# Altium PCB board.PcbDoc (part 1 of 2)
Units mil, origin at the board's own origin, x right, y up, seen from the top; angles counter-clockwise.
Board outline 5000 x 4000 mil, 2 copper layers (Top Layer, Bottom Layer); 120 components, 119 nets, 460 pads, 45 vias.
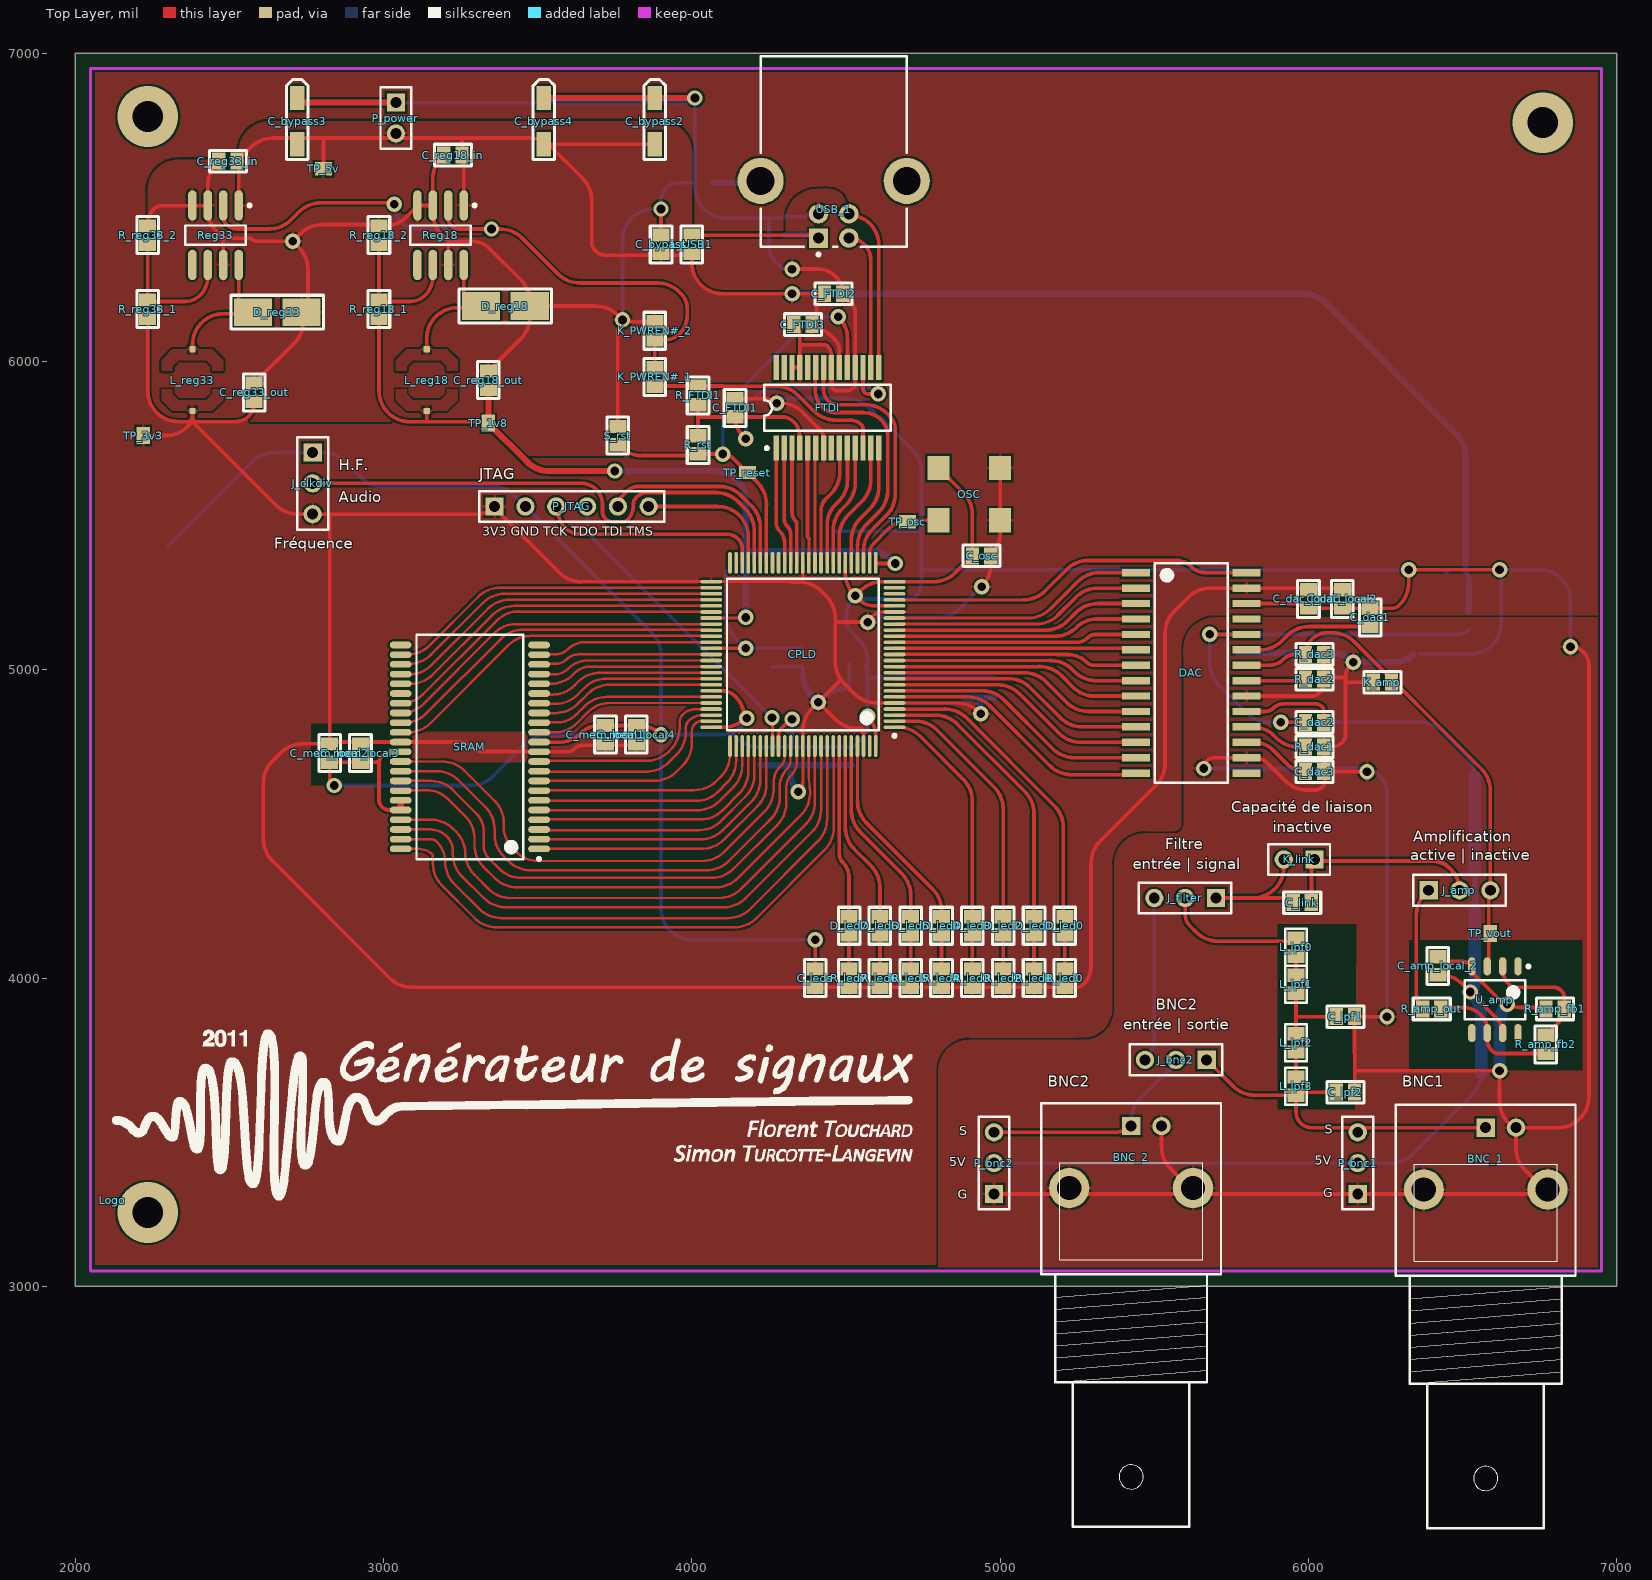
[diagram p0: Top Layer view]
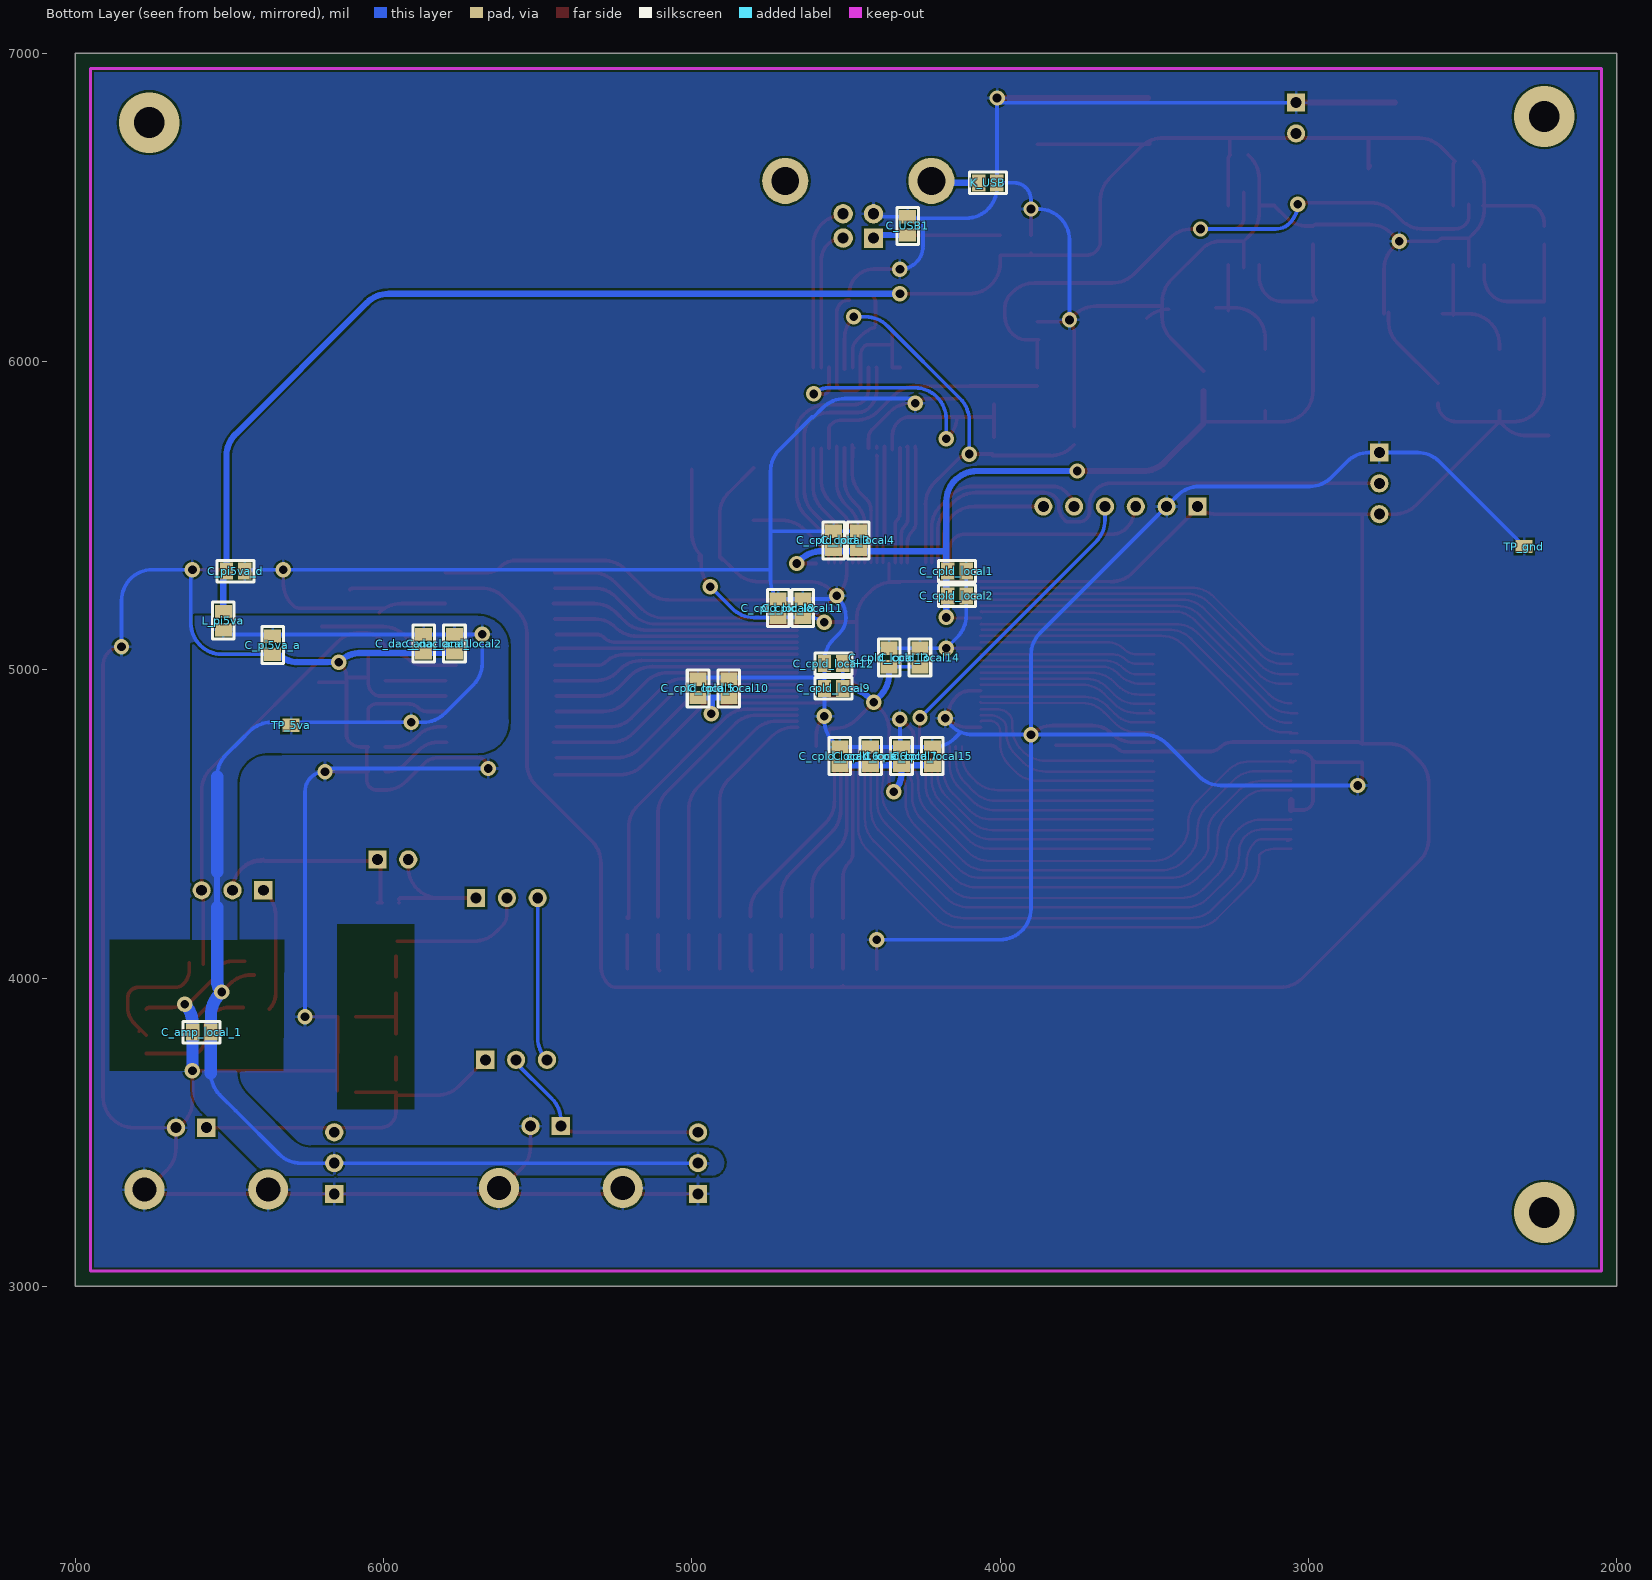
[diagram p1: Bottom Layer view, seen from below]

## Layer stack, top to bottom
Top Layer: signal copper 1.4
Dielectric: dielectric 12.6, FR-4, Dk 4.8
Bottom Layer: signal copper 1.4

## Board outline
2000,3000 7000,3000 7000,7000 2000,7000

## Design rules (kind name [scope] priority, off if disabled: settings)
Clearance Clearance_CPLD [(InComponent('CPLD') OR InComponent('FTDI'))] p1: gap=7
Clearance [All] p2: gap=7
HoleSize [All] p1 off: absolutevalues=TRUE maxlimit=100 minlimit=1 maxpercent=80.000 minpercent=20.000
MinimumSolderMaskSliver [All] p1 off: minsoldermaskwidth=10
PlaneConnect PlaneConnect_1 [IsVia] p1: planeconnectstyle=Direct reliefexpansion=20 reliefentries=4 reliefconductorwidth=10 reliefairgap=10
PlaneConnect [All] p2: planeconnectstyle=Relief reliefexpansion=20 reliefentries=4 reliefconductorwidth=10 reliefairgap=10
PolygonConnect PolygonConnect_1 [All] p1: connectstyle=Relief reliefconductorwidth=10 reliefentries=4 polygonreliefangle="90 Angle"
PolygonConnect [IsVia] p2: connectstyle=Direct reliefconductorwidth=10 reliefentries=4 polygonreliefangle="90 Angle"
RoutingVias [All] p1: holewidth=25 width=40 viastyle="Through Hole" minholewidth=28 minwidth=50 maxholewidth=28 maxwidth=50
SilkToSilkClearance [All] p1 off: silktosilkclearance=0
SilkscreenOverComponentPads [All] p1 off: minsilkscreentomaskgap=0
SolderMaskExpansion [All] p1: expansion=4
Width POWER [(InNet('1V8') OR InNet('3V3') OR InNet('5V') OR InNet('5VA') OR InNet('AGND') OR InNet('GND'))] p1: maxlimit=50 minlimit=10 preferedwidth=15
Width [All] p2: maxlimit=50 minlimit=8 preferedwidth=10
23 further rules are at their usual default settings.

## Classes and differential pairs
net class USB_DATA[7..0]: USB_DATA0 USB_DATA1 USB_DATA2 USB_DATA3 USB_DATA4 USB_DATA5 USB_DATA6 USB_DATA7
net class DAC_DATA[13..0]: DAC_DATA0 DAC_DATA1 DAC_DATA2 DAC_DATA3 DAC_DATA4 DAC_DATA5 DAC_DATA6 DAC_DATA7 DAC_DATA8 DAC_DATA9 DAC_DATA10 DAC_DATA11 DAC_DATA12 DAC_DATA13
component class USB: C_bypass C_bypass2 C_bypass3 C_bypass4 C_FTDI1 C_FTDI2 C_FTDI3 C_USB1 FTDI K_PWREN#_1 K_PWREN#_2 K_USB L_USB1 P_power R_FTDI1 R_rst S_rst TP_5v TP_gnd TP_reset USB_1
component class SRAM: C_mem_local1 C_mem_local2 C_mem_local3 C_mem_local4 SRAM
component class OUTPUT: BNC_1 BNC_2 C_amp_local_1 C_amp_local_2 C_link C_lpf1 C_lpf2 J_amp J_bnc2 J_filter K_amp K_link L_lpf0 L_lpf1 L_lpf2 L_lpf3 P_bnc1 P_bnc2 R_amp_fb1 R_amp_fb2 R_amp_out U_amp
component class DAC: C_dac1 C_dac2 C_dac3 C_dac_ana_local1 C_dac_ana_local2 C_dac_local1 C_dac_local2 DAC R_dac1 R_dac2 R_dac3 TP_vout
component class CPLD: C_cpld_local1 C_cpld_local2 C_cpld_local3 C_cpld_local4 C_cpld_local5 C_cpld_local6 C_cpld_local7 C_cpld_local8 C_cpld_local9 C_cpld_local10 C_cpld_local11 C_cpld_local12 C_cpld_local13 C_cpld_local14 C_cpld_local15 C_cpld_local16 C_leds C_osc CPLD D_led0 D_led1 D_led2 D_led3 D_led4 D_led5 D_led6 D_led7 J_clkdiv OSC P_JTAG R_led0 R_led1 R_led2 R_led3 R_led4 R_led5 R_led6 R_led7 TP_osc
component class ALIMENTATION: C_pi5va_a C_pi5va_d C_reg18_in C_reg18_out C_reg33_in C_reg33_out D_reg18 D_reg33 L_pi5va L_reg18 L_reg33 R_reg18_1 R_reg18_2 R_reg33_1 R_reg33_2 Reg18 Reg33 TP_1v8 TP_3v3 TP_5va
net class MEM_ADDR[15..0]: MEM_ADDR0 MEM_ADDR1 MEM_ADDR2 MEM_ADDR3 MEM_ADDR4 MEM_ADDR5 MEM_ADDR6 MEM_ADDR7 MEM_ADDR8 MEM_ADDR9 MEM_ADDR10 MEM_ADDR11 MEM_ADDR12 MEM_ADDR13 MEM_ADDR14 MEM_ADDR15
net class MEM_DATA[15..0]: MEM_DATA0 MEM_DATA1 MEM_DATA2 MEM_DATA3 MEM_DATA4 MEM_DATA5 MEM_DATA6 MEM_DATA7 MEM_DATA8 MEM_DATA9 MEM_DATA10 MEM_DATA11 MEM_DATA12 MEM_DATA13 MEM_DATA14 MEM_DATA15

## Components (designator, comment, footprint, x,y, rotation, side; value= is the part's Value field where it differs from the comment)
BNC_1 "BNC1" "BNC_RA CON" 6575,3515 r90 top
BNC_2 "BNC2" "BNC_RA CON" 5425,3520 r90 top
C_amp_local_1 "Cap Semi" 0805 6590,3825 r180 bottom
C_amp_local_2 "Cap Semi" 0805 6420,4040 r270 top
C_bypass "Cap" 0805 3900,6380 r90 top
C_bypass2 "Cap" Capacitor_bypass 3880,6780 r90 top
C_bypass3 "Cap" Capacitor_bypass 2720,6780 r90 top
C_bypass4 "Cap" Capacitor_bypass 3520,6780 r90 top
C_cpld_local1 "Cap Semi" 0805 4140,5320 r0 bottom
C_cpld_local2 "Cap Semi" 0805 4140,5240 r0 bottom
C_cpld_local3 "Cap Semi" 0805 4540,5420 r270 bottom
C_cpld_local4 "Cap Semi" 0805 4460,5420 r270 bottom
C_cpld_local5 "Cap Semi" 0805 4980,4940 r90 bottom
C_cpld_local6 "Cap Semi" 0805 4420,4720 r90 bottom
C_cpld_local7 "Cap Semi" 0805 4320,4720 r90 bottom
C_cpld_local8 "Cap Semi" 0805 4720,5200 r90 bottom
C_cpld_local9 "Cap Semi" 0805 4540,4940 r0 bottom
C_cpld_local10 "Cap Semi" 0805 4880,4940 r90 bottom
C_cpld_local11 "Cap Semi" 0805 4640,5200 r90 bottom
C_cpld_local12 "Cap Semi" 0805 4540,5020 r0 bottom
C_cpld_local13 "Cap Semi" 0805 4360,5040 r90 bottom
C_cpld_local14 "Cap Semi" 0805 4260,5040 r90 bottom
C_cpld_local15 "Cap Semi" 0805 4220,4720 r270 bottom
C_cpld_local16 "Cap Semi" 0805 4520,4720 r270 bottom
C_dac1 "Cap" 0805 6200,5170 r270 top
C_dac2 "Cap" 0805 6020,4830 r0 top
C_dac3 "Cap" 0805 6020,4670 r0 top
C_dac_ana_local1 "Cap Semi" 0805 5870,5085 r90 bottom
C_dac_ana_local2 "Cap Semi" 0805 5770,5085 r90 bottom
C_dac_local1 "Cap Semi" 0805 6000,5230 r90 top
C_dac_local2 "Cap Semi" 0805 6110,5230 r90 top
C_FTDI1 "Cap" 0805 4140,5850 r90 top
C_FTDI2 "Cap" 0805 4460,6220 r180 top
C_FTDI3 "Cap" 0805 4360,6120 r0 top
C_leds "Cap Semi" 0805 4400,4000 r270 top
C_link "ACCap" 0805 5980,4245 r180 top
C_lpf1 "Cap" 0805 6120,3875 r180 top
C_lpf2 "Cap" 0805 6120,3630 r180 top
C_mem_local1 "Cap Semi" 0805 3720,4790 r270 top
C_mem_local2 "Cap Semi" 0805 2825,4730 r90 top
C_mem_local3 "Cap Semi" 0805 2925,4730 r270 top
C_mem_local4 "Cap Semi" 0805 3820,4790 r90 top
C_osc "Cap Semi" 0805 4940,5370 r0 top
C_pi5va_a "Cap" 0805 6360,5080 r270 bottom
C_pi5va_d "Cap" 0805 6480,5320 r180 bottom
C_reg18_in "Cap" 0805 3225,6670 r0 top
C_reg18_out "Cap" 0805 3340,5940 r90 top
C_reg33_in "Cap" 0805 2495,6650 r0 top
C_reg33_out "Cap" 0805 2580,5900 r90 top
C_USB1 "Cap" 0805 4300,6440 r90 bottom
CPLD "XC2C256-7VQ100I" VQ100_N 4360,5050 r180 top
D_led0 "LED3" 0805 5210,4170 r90 top
D_led1 "LED3" 0805 5110,4170 r90 top
D_led2 "LED3" 0805 5010,4170 r90 top
D_led3 "LED3" 0805 4910,4170 r90 top
D_led4 "LED3" 0805 4810,4170 r90 top
D_led5 "LED3" 0805 4710,4170 r90 top
D_led6 "LED3" 0805 4610,4170 r90 top
D_led7 "LED3" 0805 4510,4170 r90 top
D_reg18 "Schottky FWD" Diode 3395,6180 r180 top
D_reg33 "Schottky FWD" Diode 2655,6160 r180 top
DAC "DAC" SOIC28 5620,4990 r0 top
FTDI "FT245RL" SSOP28 4440,5850 r0 top
J_amp "AOPActif" HDR1X3 6390,4285 r0 top
J_bnc2 "BNC2Mode" HDR1X3 5670,3735 r180 top
J_clkdiv "ClkDivision" HDR1X3 2770,5705 r270 top
J_filter "FiltreMode" HDR1X3 5700,4260 r180 top
K_amp "Res2" 0805 6240,4960 r0 top
K_link "Header 2" HDR1X2 6020,4385 r180 top
K_PWREN#_1 "Res2" 0805 3880,5950 r90 top
K_PWREN#_2 "Res2" 0805 3880,6100 r90 top
K_USB "Res2" 0805 4040,6580 r180 bottom
L_lpf0 "Inductor" 0805 5960,4100 r270 top
L_lpf1 "Inductor" 0805 5960,3980 r270 top
L_lpf2 "Inductor" 0805 5960,3790 r270 top
L_lpf3 "Inductor" 0805 5960,3650 r270 top
L_pi5va "Inductor" 0805 6520,5160 r270 bottom
L_reg18 "Inductor" Bobine_alim 3140,5940 r270 top
L_reg33 "Inductor" Bobine_alim 2380,5940 r270 top
L_USB1 "Inductor" 0805 4000,6380 r270 top
Logo "Comment" ? 2120,3280 r0 top
OSC "Osc" OSC 4900,5570 r180 top
P_bnc1 "Header 3" HDR1X3 6160,3300 r90 top
P_bnc2 "Header 3" HDR1X3 4980,3300 r90 top
P_JTAG "Header 6" HDR1X6 3360,5530 r0 top
P_power "Header 2" HDR1X2 3040,6840 r270 top
R_amp_fb1 "RNegFdbk1" 0805 6800,3900 r0 top
R_amp_fb2 "RNegFdbk2" 0805 6770,3785 r90 top
R_amp_out "RAopZOutput" 0805 6400,3900 r0 top
R_dac1 "Res2" 0805 6020,4750 r180 top
R_dac2 "Res2" 0805 6020,4970 r180 top
R_dac3 "Res2" 0805 6020,5050 r180 top
R_FTDI1 "Res2" 0805 4020,5890 r270 top
R_led0 "Res2" 0805 5210,4000 r270 top
R_led1 "Res2" 0805 5110,4000 r270 top
R_led2 "Res2" 0805 5010,4000 r270 top
R_led3 "Res2" 0805 4910,4000 r270 top
R_led4 "Res2" 0805 4810,4000 r270 top
R_led5 "Res2" 0805 4710,4000 r270 top
R_led6 "Res2" 0805 4610,4000 r270 top
R_led7 "Res2" 0805 4510,4000 r270 top
R_reg18_1 "Res3" 0805 2985,6170 r270 top
R_reg18_2 "Res3" 0805 2985,6410 r90 top
R_reg33_1 "Res3" 0805 2235,6170 r270 top
R_reg33_2 "Res3" 0805 2235,6410 r90 top
R_rst "Res2" 0805 4020,5730 r90 top
Reg18 "Hacheur" SOIC8_M 3185,6410 r270 top
Reg33 "Hacheur" SOIC8_M 2455,6410 r270 top
S_rst "SW-SPST" 0805 3760,5760 r270 top
SRAM "SRAM" TSOP44 3280,4750 r180 top
TP_1v8 "TestPoint" testpoint 3340,5800 r180 top
TP_3v3 "TestPoint" testpoint 2220,5760 r180 top
TP_5v "TestPoint" testpoint 2805,6625 r90 top
TP_5va "TestPoint" testpoint 6300,4820 r270 bottom
TP_gnd "TestPoint" testpoint 2300,5400 r270 bottom
TP_osc "TestPoint" testpoint 4700,5480 r90 top
TP_reset "TestPoint" testpoint 4180,5640 r90 top
TP_vout "TestPoint" testpoint 6590,4145 r0 top
U_amp "AOP" SOIC127P600-8CN 6605,3930 r270 top
USB_1 "USB" USB2.5-2H4E 4460,6440 r90 top

## Footprints (in the part's own frame and the unit in brackets; to place one, negate y for a bottom-side part, rotate by r counter-clockwise, add the part's x,y. Pads: shape width x height; smd on the part's side, far side on the other; paste and mask are expansions set on the pad)
0805 [mm]
  rect 1.1x1.4 smd: 1(-0.75,0) 2(0.75,0)
  silkscreen extent -1.52,-0.89 1.52,0.89, body extent -1.1,-0.72 1.1,0.72, height 1.1
"BNC_RA CON" [mm] "Connector; BNC Elbow"
  rect 1.5x1.5 hole 0.9: 1(0,0)
  round 3.3 hole 2: 2(-5.1,-5.1) 2(-5.1,5.1)
  round 1.5 hole 0.9: 2(0,-2.5)
  silkscreen extent -33,-7.4 1.9,7.4
Bobine_alim [mil]
  rect 20x20 smd: 1(-100,0) 2(100,0)
Capacitor_bypass [mm]
  rect 2x1.2 smd: 1(-1.9,0) 2(1.9,0)
  silkscreen extent -3.17,-0.89 3.43,0.89
Diode [mm]
  rect 3.14x2.3 smd: 1(-2.01,0) 2(2.01,0)
  silkscreen extent -3.81,-1.4 3.81,1.4
HDR1X2 [mm] "Connector; Header; 2 Position"
  rect 1.5x1.5 hole 0.9: 1(0,0)
  round 1.5 hole 0.9: 2(2.54,0)
  silkscreen extent -1.27,-1.27 3.81,1.27
HDR1X3 [mm] "Connector; Header; 3 Position"
  rect 1.5x1.5 hole 0.9: 1(0,0)
  round 1.5 hole 0.9: 2(2.54,0) 3(5.08,0)
  silkscreen extent -1.27,-1.27 6.35,1.27
HDR1X6 [mm] "Connector; Header; 6 Position"
  rect 1.5x1.5 hole 0.9: 1(0,0)
  round 1.5 hole 0.9: 2(2.54,0) 3(5.08,0) 4(7.62,0) 5(10.16,0) 6(12.7,0)
  silkscreen extent -1.27,-1.27 13.97,1.27
OSC [mil]
  rect 71x79 smd: 1(-100,-85) 2(100,-85) 3(100,85) 4(-100,85)
SOIC8_M [mm] "SOIC, 8-Leads, Body 4.9x3.9mm, Pitch 1.27mm, IPC Low Density"
  oval 2.5x0.7 smd: 1(-2.45,1.905) 2(-2.45,0.635) 3(-2.45,-0.635) 4(-2.45,-1.905) 5(2.45,-1.905) 6(2.45,-0.635) 7(2.45,0.635) 8(2.45,1.905)
  silkscreen extent -2.57,-2.5 0.8,2.93, body extent -2,-2.5 2,2.5, height 1.75
SOIC28 [mm]
  rect 2.3x0.6 smd: 1(-4.55,8.255) 2(-4.55,6.985) 3(-4.55,5.715) 4(-4.55,4.445) 5(-4.55,3.175) 6(-4.55,1.905) 7(-4.55,0.635) 8(-4.55,-0.635) 9(-4.55,-1.905) 10(-4.55,-3.175) 11(-4.55,-4.445) 12(-4.55,-5.715) 13(-4.55,-6.985) 14(-4.55,-8.255) 15(4.55,-8.255) 16(4.55,-6.985) 17(4.55,-5.715) 18(4.55,-4.445) 19(4.55,-3.175) 20(4.55,-1.905) 21(4.55,-0.635) 22(4.55,0.635) 23(4.55,1.905) 24(4.55,3.175) 25(4.55,4.445) 26(4.55,5.715) 27(4.55,6.985) 28(4.55,8.255)
  silkscreen extent -3,-9.05 3,9.05, body extent -3.8,-9.06 3.8,9.06, height 2.65
SOIC127P600-8CN [mm] "SOIC, 8-Leads, Body 4.9x3.9mm, Pitch 1.27mm, IPC Medium Density"
  oval 1.5x0.6 smd: 1(-2.75,1.905) 2(-2.75,0.635) 3(-2.75,-0.635) 4(-2.75,-1.905) 5(2.75,-1.905) 6(2.75,-0.635) 7(2.75,0.635) 8(2.75,1.905)
  silkscreen extent -2.87,-2.5 1.6,2.88, body extent -2,-2.5 2,2.5, height 1.73
SSOP28 [mm] "SSOP; 28 Leads; Body Width 5.3 mm; Pitch 0.65 mm"
  rect 0.45x2.05 smd: 1(-4.225,-3.325) 2(-3.575,-3.325) 3(-2.925,-3.325) 4(-2.275,-3.325) 5(-1.625,-3.325) 6(-0.975,-3.325) 7(-0.325,-3.325) 8(0.325,-3.325) 9(0.975,-3.325) 10(1.625,-3.325) 11(2.275,-3.325) 12(2.925,-3.325) 13(3.575,-3.325) 14(4.225,-3.325) 15(4.225,3.325) 16(3.575,3.325) 17(2.925,3.325) 18(2.275,3.325) 19(1.625,3.325) 20(0.975,3.325) 21(0.325,3.325) 22(-0.325,3.325) 23(-0.975,3.325) 24(-1.625,3.325) 25(-2.275,3.325) 26(-2.925,3.325) 27(-3.575,3.325) 28(-4.225,3.325)
  silkscreen extent -5.2,-3.45 5.2,1.9
testpoint [mm]
  rect 1.1x1.4 smd: 1(0,0)
  body extent -1.1,-0.72 1.1,0.72, height 1.1
TSOP44 [mm]
  oval 1.8x0.55 smd: 1(-5.7,8.4) 2(-5.7,7.6) 3(-5.7,6.8) 4(-5.7,6) 5(-5.7,5.2) 6(-5.7,4.4) 7(-5.7,3.6) 8(-5.7,2.8) 9(-5.7,2) 10(-5.7,1.2) 11(-5.7,0.4) 12(-5.7,-0.4) 13(-5.7,-1.2) 14(-5.7,-2) 15(-5.7,-2.8) 16(-5.7,-3.6) 17(-5.7,-4.4) 18(-5.7,-5.2) 19(-5.7,-6) 20(-5.7,-6.8) 21(-5.7,-7.6) 22(-5.7,-8.4) 23(5.7,-8.4) 24(5.7,-7.6) 25(5.7,-6.8) 26(5.7,-6) 27(5.7,-5.2) 28(5.7,-4.4) 29(5.7,-3.6) 30(5.7,-2.8) 31(5.7,-2) 32(5.7,-1.2) 33(5.7,-0.4) 34(5.7,0.4) 35(5.7,1.2) 36(5.7,2) 37(5.7,2.8) 38(5.7,3.6) 39(5.7,4.4) 40(5.7,5.2) 41(5.7,6) 42(5.7,6.8) 43(5.7,7.6) 44(5.7,8.4)
  silkscreen extent -5.82,-9.25 4.4,9.35, body extent -5.13,-9.26 5.13,9.26, height 1.2
USB2.5-2H4E [mm] "Connector; USB1.1, Type B, Thru-Hole; 4 Position; Right Angle"
  rect 1.6x1.6 hole 0.92: 1(-1,1.25)
  round 1.6 hole 0.92: 2(-1,-1.25) 3(1,-1.25) 4(1,1.25)
  round 3.8 hole 2.3: 5(3.71,6.02) 6(3.71,-6.02)
  silkscreen extent -2.47,-6.02 13.99,6.02, body extent -1.72,-6.02 13.99,6.02, height 11.5
VQ100_N [mm] "100-Pin Very Thin Quad Flat Pack (VQ100), IPC Medium Density"
  oval 1.8x0.3 smd: 1(-7.55,6) 2(-7.55,5.5) 3(-7.55,5) 4(-7.55,4.5) 5(-7.55,4) 6(-7.55,3.5) 7(-7.55,3) 8(-7.55,2.5) 9(-7.55,2) 10(-7.55,1.5) 11(-7.55,1) 12(-7.55,0.5) 13(-7.55,0) 14(-7.55,-0.5) 15(-7.55,-1) 16(-7.55,-1.5) 17(-7.55,-2) 18(-7.55,-2.5) 19(-7.55,-3) 20(-7.55,-3.5) 21(-7.55,-4) 22(-7.55,-4.5) 23(-7.55,-5) 24(-7.55,-5.5) 25(-7.55,-6) 51(7.55,-6) 52(7.55,-5.5) 53(7.55,-5) 54(7.55,-4.5) 55(7.55,-4) 56(7.55,-3.5) 57(7.55,-3) 58(7.55,-2.5) 59(7.55,-2) 60(7.55,-1.5) 61(7.55,-1) 62(7.55,-0.5) 63(7.55,0) 64(7.55,0.5) 65(7.55,1) 66(7.55,1.5) 67(7.55,2) 68(7.55,2.5) 69(7.55,3) 70(7.55,3.5) 71(7.55,4) 72(7.55,4.5) 73(7.55,5) 74(7.55,5.5) 75(7.55,6)
  oval 0.3x1.8 smd: 26(-6,-7.55) 27(-5.5,-7.55) 28(-5,-7.55) 29(-4.5,-7.55) 30(-4,-7.55) 31(-3.5,-7.55) 32(-3,-7.55) 33(-2.5,-7.55) 34(-2,-7.55) 35(-1.5,-7.55) 36(-1,-7.55) 37(-0.5,-7.55) 38(0,-7.55) 39(0.5,-7.55) 40(1,-7.55) 41(1.5,-7.55) 42(2,-7.55) 43(2.5,-7.55) 44(3,-7.55) 45(3.5,-7.55) 46(4,-7.55) 47(4.5,-7.55) 48(5,-7.55) 49(5.5,-7.55) 50(6,-7.55) 76(6,7.55) 77(5.5,7.55) 78(5,7.55) 79(4.5,7.55) 80(4,7.55) 81(3.5,7.55) 82(3,7.55) 83(2.5,7.55) 84(2,7.55) 85(1.5,7.55) 86(1,7.55) 87(0.5,7.55) 88(0,7.55) 89(-0.5,7.55) 90(-1,7.55) 91(-1.5,7.55) 92(-2,7.55) 93(-2.5,7.55) 94(-3,7.55) 95(-3.5,7.55) 96(-4,7.55) 97(-4.5,7.55) 98(-5,7.55) 99(-5.5,7.55) 100(-6,7.55)
  silkscreen extent -7.68,-6.25 6.25,6.82, body extent -7,-7 7,7, height 1.2
? [mil]
  silkscreen extent 0,0 2595,552

## Part data
BNC_1 BNC_2: library part BNC, "BNC Elbow Connector"
C_amp_local_1 C_amp_local_2 C_cpld_local1 C_cpld_local2 C_cpld_local3 C_cpld_local4 C_cpld_local5 C_cpld_local6 C_cpld_local7 C_cpld_local8 C_cpld_local9 C_cpld_local10 C_cpld_local11 C_cpld_local12 C_cpld_local13 C_cpld_local14 C_cpld_local15 C_cpld_local16 C_dac_ana_local1 C_dac_ana_local2 C_dac_local1 C_dac_local2 C_leds C_mem_local1 C_mem_local2 C_mem_local3 C_mem_local4 C_osc: "Capacitor (Semiconductor SIM Model)"
C_bypass C_bypass2 C_bypass3 C_bypass4 C_dac1 C_dac2 C_dac3 C_FTDI1 C_FTDI2 C_FTDI3 C_lpf1 C_lpf2 C_pi5va_a C_pi5va_d C_reg18_in C_reg18_out C_reg33_in C_reg33_out C_USB1: "Capacitor"
C_link: library part Cap, "Capacitor"
CPLD: "CoolRunner-II 1.8V, 256 Macrocell CPLD, 80 User I/Os, 100-Pin VQFP, Industrial Grade"
D_led0 D_led1 D_led2 D_led3 D_led4 D_led5 D_led6 D_led7: "Typical BLUE SiC LED"
D_reg18 D_reg33: library part "Diode BAT17", "Silicon RF Schottky Diode for Mixer Applications in the VHF/UHF Range"
J_amp J_bnc2 J_clkdiv J_filter: library part "Header 3", "Header, 3-Pin"
K_amp K_PWREN#_1 K_PWREN#_2 K_USB R_dac1 R_dac2 R_dac3 R_FTDI1 R_led0 R_led1 R_led2 R_led3 R_led4 R_led5 R_led6 R_led7 R_reg18_1 R_reg18_2 R_reg33_1 R_reg33_2 R_rst: "Resistor"
K_link P_power: "Header, 2-Pin"
P_bnc1 P_bnc2: "Header, 3-Pin"
P_JTAG: "Header, 6-Pin"
R_amp_fb1 R_amp_fb2 R_amp_out: library part Res3, "Resistor"
S_rst: "Single-Pole, Single-Throw Switch"

## Via types
v1: diameter 50, hole 28, Top Layer to Bottom Layer, 42 vias
v2: diameter 196.85, hole 100, Top Layer to Bottom Layer, 3 vias

## Nets (pads, with @x,y where several pads share a name; then routed paths per layer and width w, separated by ;. In a path a pad name is that pad's centre, name@x,y a point inside that pad or via, vN(x,y) a via of type N, cw(c..) or ccw(c..) an arc to the next point about the centre after c; other vN are vias at no path point)
1V8: C_cpld_local1.2 C_cpld_local2.2 C_cpld_local3.2 C_cpld_local4.2 C_reg18_out.1 CPLD.26 CPLD.57 L_reg18.2 R_reg18_1.2 TP_1v8.1 | length 2811.9
  Top Layer w11: CPLD.57@4062.76,5168.11 v1@4170.44,5168.11
  Top Layer w12: 2985,6111.42 R_reg18_1.2@2985,6140 ; R_reg18_1.2@2985,6140.47 2985,5905 ccw(c3085,5905) 3085,5805 3140,5805 ; L_reg18.2@3140,5840 3140,5805 ; TP_1v8.1@3340,5805 3140,5805 ; CPLD.26@4596.54,5345 v1(4660,5345)
  Top Layer w20: C_reg18_out.1@3340,5905 3340,5805 TP_1v8.1@3340,5800 3465.71,5674.29 ccw(c3536.42,5745) 3536.42,5645 v1(3750,5645)
  Bottom Layer w12: v1@4649.29,5355.71 v1(4660,5345) v1@4659.76,5345.24
  Bottom Layer w20: v1(3750,5645) 4075,5645 cw(c4075,5545) 4175,5545 4175,5385 ; v1(4175,5170) 4175,5228.79 4175,5320 4175,5385 ; v1@4649.29,5355.71 ccw(c4578.58,5285) 4578.58,5385 4175,5385
3V3: C_cpld_local5.1 C_cpld_local6.1 C_cpld_local7.1 C_cpld_local8.1 C_cpld_local9.1 C_cpld_local10.1 C_cpld_local11.1 C_cpld_local12.1 C_cpld_local13.1 C_cpld_local14.1 C_cpld_local15.2 C_cpld_local16.2 C_dac_local1.2 C_dac_local2.2 C_leds.2 C_mem_local1.2 C_mem_local2.2 C_mem_local3.1 C_mem_local4.1 C_osc.2 C_reg33_out.1 CPLD.5 CPLD.20 CPLD.38 CPLD.51 CPLD.88 CPLD.98 DAC.27 J_clkdiv.3 L_reg33.2 OSC.1 OSC.4 P_JTAG.1 R_led0.2 R_led1.2 R_led2.2 R_led3.2 R_led4.2 R_led5.2 R_led6.2 R_led7.2 R_reg33_1.2 SRAM.11 SRAM.33 TP_3v3.1 | length 14042.2
  Top Layer w10: 3640.2,5286.22 CPLD.51@4062.76,5286.22 4328.8,5286.22 ; 4360,4634.14 CPLD.88@4360,4752.76 4360,4803.58 ; 4360,5284.35 CPLD.38@4360,5347.24 ; CPLD.98@4556.85,4781.39 CPLD.98@4556.85,4752.76 4556.85,4793.46 ; 4598.9,4892.52 CPLD.5@4657.24,4892.52
  Top Layer w11: v1@4580,5170 cw(c4622.96,5127.04) CPLD.20@4624.93,5187.76 ; CPLD.5@4657.24,4892.52 4861.06,4892.52 cw(c4861.06,4792.52) v1@4931.77,4863.23
  Top Layer w12: TP_3v3.1@2220,5760 2293.58,5760 ccw(c2293.58,5860) 2364.29,5789.29 2380,5805 ; 2235,6111.42 R_reg33_1.2@2235,6140.47 2235,5905 ccw(c2335,5905) 2335,5805 2380,5805 ; L_reg33.2@2380,5840 2380,5805 ; C_reg33_out.1@2580,5865 cw(c2520,5865) 2520,5805 2380,5805 ; C_mem_local2.2@2820,4760 2736.42,4760 ccw(c2736.42,4660) 2665.71,4730.71 2639.29,4704.29 ccw(c2710,4633.58) 2610,4633.58 2610,4451.42 ccw(c2710,4451.42) 2639.29,4380.71 3020.24,3999.76 ccw(c3090.95,4070.47) 3090.95,3970.47 C_leds.2@4400,3970.47 4508.86,3970.47 cw(c4508.86,3968.86) R_led7.2@4510,3970 ; 2825,5500 C_mem_local2.2@2825,4760 ; 2943.79,5505 2930,5505 ; SRAM.33@3055,4765 SRAM.33@3055.59,4765 ; P_JTAG.1@3360,5525 3569.49,5315.51 ccw(c3640.2,5386.22) 3640.2,5286.22 ; SRAM.11@3504.41,4734.25 3594.05,4734.25 ccw(c3594.05,4770.95) 3620,4745 cw(c3644.14,4720.86) 3644.14,4755 C_mem_local4.1@3820,4755 ; SRAM.11@3510,4735 3505,4735 3321.21,4735 cw(c3321.21,4786.21) 3285,4750 ccw(c3246.98,4711.98) 3246.98,4765.75 SRAM.33@3055.59,4765.75 2838.88,4765.75 ccw(c2838.88,4746.12) C_mem_local2.2@2825,4760 ; 4325,5285 4348.58,5285 cw(c4348.58,5185) 4360,5284.35 cw(c4348.58,5185) 4419.29,5255.71 4435.71,5239.29 cw(c4365,5168.58) 4463.14,5187.8 cw(c4365,5168.58) 4465,5168.58 4465,5155 ; v1(4345,4605) 4350,4610 ccw(c4325.86,4634.14) 4360,4634.14 ; 4360,4803.58 cw(c4460,4803.58) 4389.29,4874.29 v1(4410,4895) ; R_led7.2@4510,3975 ccw(c4520.93,3985.93) 4520.93,3970.47 R_led6.2@4610,3970.47 R_led5.2@4710,3970.47 R_led4.2@4810,3970.47 R_led3.2@4910,3970.47 R_led2.2@5010,3970.47 R_led1.2@5110,3970.47 R_led0.2@5210,3970.47 5247,3970.47 ccw(c5247,4003) 5266.4,3976.89 ccw(c5247,4003) 5270,3980 ccw(c5209.64,4040.36) 5295,4040.36 5295,4373.58 cw(c5395,4373.58) 5324.29,4444.29 5505.71,4625.71 ccw(c5435,4696.42) 5535,4696.42 5535,5118.58 cw(c5635,5118.58) 5564.29,5189.29 5610.71,5235.71 cw(c5681.42,5165) 5681.42,5265 DAC.27@5799.13,5265 ; 4556.85,4793.46 ccw(c4533.46,4793.46) 4550,4810 4536.42,4810 cw(c4536.42,4910) 4465.71,4839.29 v1(4410,4895) ; v1@4570,5172.93 v1(4570,5155) ; v1@4577.07,5172.07 ccw(c4594.14,5155) v1(4570,5155) ; 4598.9,4892.52 cw(c4598.9,4992.52) 4528.19,4921.81 4494.29,4955.71 cw(c4565,5026.42) 4483.49,4968.49 ; v1(4940,5270) 4940.24,5270.24 ccw(c4869.53,5340.95) 4969.53,5340.95 C_osc.2@4969.53,5370 4970.71,5371.18 ccw(c4900,5441.89) 5000,5441.89 OSC.4@5000,5485 OSC.1@5000,5650 ; C_osc.2@4975,5354.14 C_osc.2@4975,5370 ; R_led0.2@5205,3970 R_led0.2@5210,3970 ; DAC.27@5800,5265 DAC.27@5799.13,5265 ; C_dac_local2.2@6110,5260 ccw(c6097.93,5247.93) 6097.93,5265 DAC.27@5799.13,5265 ; 2380,5805 2650.71,5534.29 ccw(c2721.42,5605) 2721.42,5505 J_clkdiv.3@2770,5505 2930,5505 ; C_mem_local2.2@2825,4759.53 cw(c2838.21,4746.32) C_mem_local2.2@2838.21,4765 ; C_mem_local2.2@2825,4759.53 cw(c2838.21,4746.32) C_mem_local2.2@2838.21,4765 ; C_mem_local2.2@2825,4759.53 cw(c2838.21,4746.32) C_mem_local2.2@2838.21,4765 ; C_mem_local2.2@2825,4759.53 cw(c2838.21,4746.32) C_mem_local2.2@2838.21,4765 ; C_mem_local2.2@2825,4759.53 C_mem_local2.2@2825,4760 ; 2930,5505 3299.64,5505 ; 3299.64,5505 ccw(c3299.64,5590.36) P_JTAG.1@3360,5530 ; 3299.64,5505 ccw(c3299.64,5590.36) P_JTAG.1@3360,5530 ; 3299.64,5505 ccw(c3299.64,5590.36) P_JTAG.1@3360,5530 ; 3299.64,5505 ccw(c3299.64,5590.36) P_JTAG.1@3360,5530 ; v1(4410,4895) 4483.49,4968.49 ; 4465,5155 v1(4570,5155) ; 4465,5155 4465,5026.42 ccw(c4565,5026.42) 4483.49,4968.49 ; C_dac_local2.2@6096.79,5265 cw(c6096.79,5246.32) C_dac_local2.2@6110,5259.53 ccw(c6096.79,5246.32) C_dac_local2.2@6096.79,5265
  Bottom Layer w12: C_cpld_local15.2@4220,4690 cw(c4221.14,4688.86) C_cpld_local15.2@4221.14,4690.47 ; C_cpld_local14.1@4260,5010 4358.86,5010 ccw(c4358.86,5011.61) C_cpld_local13.1@4360,5010.47 4360,4986.42 ; 4320,4665.36 ccw(c4405.36,4665.36) v1(4345,4605) ; C_cpld_local9.1@4496.42,4940 C_cpld_local9.1@4510.47,4940 ; C_cpld_local9.1@4510,4935 ccw(c4508.86,4936.14) 4510.47,4936.14 C_cpld_local9.1@4510.47,4940 ; C_cpld_local12.1@4510.47,5020 C_cpld_local9.1@4510.47,4940 ; v1(4570,5155) 4570,5150 cw(c4619.43,5100.57) 4619.43,5170.47 C_cpld_local11.1@4640,5170.47 C_cpld_local8.1@4720,5170.47 ; C_cpld_local11.1@4640,5170 cw(c4641.14,5168.86) C_cpld_local11.1@4641.14,5170.47 ; C_cpld_local8.1@4720,5170 4798.58,5170 ccw(c4798.58,5270) 4869.29,5199.29 v1(4940,5270) ; 4935,4910 4980,4910 C_cpld_local5.1@4980,4910.47 ; C_cpld_local16.2@4518.86,4690 ccw(c4518.86,4691.61) C_cpld_local16.2@4520,4690.47 cw(c4518.86,4691.61) C_cpld_local16.2@4518.86,4690
  Bottom Layer w20: C_cpld_local15.2@4221.14,4690.47 C_cpld_local16.2@4520,4690.47 ; 4320,4665.36 ccw(c4405.36,4665.36) v1(4345,4605) ; 4360,4986.42 ccw(c4460,4986.42) 4389.29,4915.71 ; v1@4425.71,4910.71 cw(c4496.42,4840) C_cpld_local9.1@4496.42,4940 ; C_cpld_local10.1@4880,4910.47 C_cpld_local5.1@4980,4910.47 ; v1@4935,4855 4935,4910
  other v1: 4937.52,4857.48
5V: C_bypass2.1 C_bypass3.1 C_bypass4.1 C_bypass.1 C_FTDI2.2 C_FTDI3.2 C_pi5va_d.1 C_reg18_in.2 C_reg33_in.2 FTDI.20 L_pi5va.1 L_USB1.2 P_power.2 Reg18.1 Reg33.1 TP_5v.1 | length 6363.8
  Top Layer w12: C_reg33_in.2@2525,6650 cw(c2512.93,6637.93) 2530,6637.93 C_reg33_in.2@2530,6636.79 ; Reg33.1@2530,6506.46 C_reg33_in.2@2530,6636.79 ; C_reg18_in.2@3255,6670 cw(c3242.93,6657.93) 3260,6657.93 Reg18.1@3260,6506.46 ; C_bypass4.1@3515,6710 3515,6705.2 C_bypass4.1@3520,6705.2 C_bypass2.1@3880,6705.2 ; C_bypass.1@3900,6345 3720,6345 cw(c3720,6390) 3675,6390 3675,6523.58 ccw(c3575,6523.58) 3645.71,6594.29 3544.29,6695.71 ccw(c3473.58,6625) 3478.11,6724.9 ccw(c3473.58,6625) 3473.58,6725 3255,6725 ; C_FTDI3.2@4404.53,6120 4404.53,6194.53 ; 4405,6194.53 cw(c4430.47,6194.53) C_FTDI2.2@4413.73,6213.73 ; C_FTDI3.2@4406.33,6110 cw(c4406.33,6078.95) 4428.28,6100.91 cw(c4390.36,6026.36) 4449.5,6085.5 4465,6070 cw(c4432.68,6037.68) 4478.39,6037.68 FTDI.20@4478.39,5980.91 ; C_FTDI2.2@4430.47,6220 4100,6220 cw(c4100,6320) 4000,6320 4000,6345 C_bypass.1@3905.47,6345 ; C_reg33_in.2@2524.53,6650 cw(c2511.32,6636.79) C_reg33_in.2@2530,6636.79 ; C_reg33_in.2@2524.53,6650 cw(c2511.32,6636.79) C_reg33_in.2@2530,6636.79 ; C_reg33_in.2@2524.53,6650 2570.24,6695.71 cw(c2640.95,6625) 2640.95,6725 2805,6725 ; TP_5v.1@2805,6625 cw(c2817.07,6637.07) 2800,6637.07 ccw(c2817.07,6637.07) TP_5v.1@2805,6625 ; TP_5v.1@2805,6625 2805,6725 ; 2805,6725 3255,6725 ; C_reg18_in.2@3255,6671.14 cw(c3253.39,6671.14) C_reg18_in.2@3254.53,6670 ccw(c3253.39,6671.14) C_reg18_in.2@3255,6671.14 ; C_reg18_in.2@3255,6671.14 3255,6725 ; C_bypass.1@3905.47,6345 cw(c3905.47,6350.47) C_bypass.1@3900,6350.47 ccw(c3905.47,6350.47) C_bypass.1@3905.47,6345
  Bottom Layer w12: C_pi5va_d.1@6510,5320 cw(c6485.86,5295.86) C_pi5va_d.1@6520,5295.86
  Bottom Layer w20: v1(4325,6220) 5983.58,6220 cw(c5983.58,6120) 6054.29,6190.71 6480.24,5764.76 cw(c6409.53,5694.05) 6509.53,5694.05 C_pi5va_d.1@6509.53,5320 ; L_pi5va.1@6520,5189.53 C_pi5va_d.1@6520,5295.86
5VA: C_amp_local_1.2 C_amp_local_2.2 C_dac2.1 C_dac_ana_local1.2 C_dac_ana_local2.2 C_pi5va_a.1 DAC.24 L_pi5va.2 P_bnc1.2 P_bnc2.2 TP_5va.1 U_amp.7 | length 5263.6
  Top Layer w12: v1(5680,5115) DAC.24@5799.13,5115 ; v1@5930,4830 C_dac2.1@5990.47,4830 ; C_amp_local_2.2@6420,4010.47 6428.11,4010.47 cw(c6428.11,3910.47) 6498.82,3981.18 v1(6525,3955) 6608.79,3871.21 cw(c6557.57,3820) U_amp.7@6630,3820 ; U_amp.7@6630,3821.73 6630,3825 6630,3833.58 U_amp.7@6630,3836.72
  Bottom Layer w12: P_bnc2.2@4980,3400 P_bnc1.2@6160,3400 6163.58,3400 6268.58,3400 ccw(c6268.58,3500) 6339.29,3429.29 6475,3565 ; v1@5680,5120 v1(5680,5115) ; v1@5692.07,5110 cw(c5692.07,5127.07) v1(5680,5115) ; 5708.58,5115 v1(5680,5115) ; C_dac_ana_local1.2@5870,5114.53 6453.86,5114.53 ; C_dac_ana_local1.2@5870,5115 v1(5680,5115) ; v1@5910,4825 v1(5910,4830) ; 6455,5115 cw(c6453.86,5116.14) 6453.86,5114.53 ; 6480.71,3570.71 6475,3565 ; 6480.71,4754.29 6462.5,4772.5 ; L_pi5va.2@6520,5130 cw(c6482.65,5167.35) 6482.65,5114.53 6453.86,5114.53 ; v1@6527.5,3957.5 6530,3955 v1(6525,3955) v1@6530.71,3949.29 ; 6540,4653.58 ccw(c6440,4653.58) 6510.71,4724.29 6462.5,4772.5 ; 6560.47,3691.89 cw(c6460.47,3691.89) 6531.18,3621.18 6475,3565 ; v1(5680,5115) 5680,5021.42 ccw(c5780,5021.42) 5709.29,4950.71 5800.71,4859.29 ccw(c5871.42,4930) 5871.42,4830 v1(5910,4830) ; v1(5910,4830) 6363.58,4830 cw(c6363.58,4730) 6434.29,4800.71 6462.5,4772.5
  Bottom Layer w20: 6540,4230 6540,4345
  Bottom Layer w40: v1(6525,3955) ccw(c6488.79,3991.21) 6540,3991.21 6540,4230 ; v1@6530.71,3949.29 cw(c6460,3878.58) 6560,3878.58 C_amp_local_1.2@6560,3825 ; 6540,4345 6540,4653.58 ; 6560.47,3691.89 C_amp_local_1.2@6560.47,3825
AGND: BNC_1.2 BNC_2.2 C_amp_local_1.1 C_amp_local_2.1 C_bypass2.2 C_bypass3.2 C_bypass4.2 C_bypass.2 C_cpld_local1.1 C_cpld_local2.1 C_cpld_local3.1 C_cpld_local4.1 C_cpld_local5.2 C_cpld_local6.2 C_cpld_local7.2 C_cpld_local8.2 C_cpld_local9.2 C_cpld_local10.2 C_cpld_local11.2 C_cpld_local12.2 C_cpld_local13.2 C_cpld_local14.2 C_cpld_local15.1 C_cpld_local16.1 C_dac1.1 C_dac3.2 C_dac_ana_local1.1 C_dac_ana_local2.1 C_dac_local1.1 C_dac_local2.1 C_FTDI1.2 C_FTDI2.1 C_FTDI3.1 C_leds.1 C_lpf1.1 C_lpf2.1 C_mem_local1.1 C_mem_local2.1 C_mem_local3.2 C_mem_local4.2 C_osc.1 C_pi5va_a.2 C_pi5va_d.2 C_reg18_in.1 C_reg18_out.2 C_reg33_in.1 C_reg33_out.2 C_USB1.2 CPLD.21 CPLD.25 CPLD.31 CPLD.62 CPLD.69 CPLD.75 CPLD.84 CPLD.100 D_reg18.1 D_reg33.1 DAC.16 DAC.20 DAC.26 FTDI.7 FTDI.18 FTDI.21 FTDI.25 FTDI.26 J_clkdiv.1 K_amp.1 K_PWREN#_2.2 K_USB.2 OSC.2 P_bnc1.1 P_bnc2.1 P_JTAG.2 P_power.1 R_amp_fb1.1 R_dac1.1 R_dac2.1 R_dac3.1 R_reg18_2.2 R_reg33_2.2 Reg18.3 Reg18.4 Reg18.7 Reg33.3 Reg33.4 Reg33.7 S_rst.1 SRAM.12 SRAM.34 SRAM.39 SRAM.40 TP_gnd.1 U_amp.4 USB_1.4 | length 32813.4
  Top Layer w11: CPLD.75@4062.76,4813.78 4102.36,4813.78 ; CPLD.69@4062.76,4931.89 4099.22,4931.89 ; CPLD.62@4062.76,5069.69 v1@4174.24,5069.69 ; 4591.44,5207.48 CPLD.21@4652.24,5207.48 ; CPLD.25@4657.24,5286.22 4784.8,5286.22
  Top Layer w12: R_reg33_2.2@2235,6439.53 2235,6446.72 cw(c2303.28,6446.72) 2255,6495 cw(c2279.14,6470.86) 2279.14,6505 Reg33.3@2430,6505 ; Reg33.3@2435,6505 Reg33.3@2430,6505 ; C_reg33_in.1@2465.47,6650 2459.29,6643.82 ccw(c2530,6573.11) 2430,6573.11 Reg33.3@2430,6506.46 Reg33.3@2430,6505 ; Reg33.7@2480,6310 Reg33.7@2480,6313.54 2480,6400 ; C_reg33_out.2@2580,5929.53 2710.71,6060.24 ccw(c2640,6130.95) 2740,6130.95 D_reg33.1@2740,6160 ; D_reg33.1@2755,6155 2755,6298.58 ccw(c2655,6298.58) 2725.71,6369.29 v1(2705,6390) ; v1@2835,4625 cw(c2859.14,4649.14) 2825,4649.14 C_mem_local2.1@2825,4700.47 ; C_mem_local3.2@2925,4700 C_mem_local2.1@2826.14,4700 ; C_mem_local3.2@2930,4700 2970.5,4700 ccw(c2970.5,4722.93) 2986.72,4706.72 ; R_reg18_2.2@2985,6439.53 3003.11,6439.53 ccw(c3003.11,6539.53) 3073.82,6468.82 3110,6505 cw(c3113.52,6501.48) Reg18.4@3110.93,6505.73 ; R_reg18_2.2@2985,6440 ccw(c2974.07,6429.07) 2974.07,6444.53 2800.95,6444.53 ccw(c2800.95,6344.53) 2730.24,6415.24 v1(2705,6390) ; SRAM.40@3050,4545.28 3018.48,4545.28 cw(c3018.48,4578.48) 3008.25,4546.89 cw(c3018.48,4578.48) 2995,4555 cw(c3019.14,4579.14) 2985,4579.14 2985,4695.86 cw(c3019.14,4695.86) 2986.8,4706.8 cw(c3019.14,4695.86) 2995,4720 cw(c3031.21,4683.79) 3031.21,4735 3055,4735 ccw(c3055.38,4735) 3055.11,4734.73 SRAM.34@3055.59,4734.25 ; SRAM.40@3055.59,4545 SRAM.40@3055.59,4545.28 ; Reg18.4@3110,6506.46 ccw(c3113.52,6509.97) Reg18.4@3110.93,6505.73 ; Reg18.4@3113.52,6505 cw(c3113.52,6509.97) Reg18.4@3110.93,6505.73 ; Reg18.3@3160,6491.42 Reg18.3@3160,6506.46 ; C_reg18_in.1@3195,6670 3189.29,6664.29 ccw(c3260,6593.58) C_reg18_in.1@3183.75,6658.28 ; C_reg18_in.1@3195.47,6670 C_reg18_in.1@3183.75,6658.28 ; Reg18.7@3210,6305 Reg18.7@3210,6313.54 ; Reg18.7@3210,6310 Reg18.7@3210,6313.54 ; Reg18.7@3210,6344.64 Reg18.7@3210,6313.54 ; 3287.93,6390 3210,6390 ; C_reg18_out.2@3340,5969.53 3445.71,6075.24 ccw(c3375,6145.95) 3475,6145.95 3475,6180 3688.58,6180 cw(c3688.58,6080) 3759.29,6150.71 v1(3775,6135) ccw(c3780,6135) 3780,6130 ccw(c3780.47,6130) 3780.47,6129.53 K_PWREN#_2.2@3880,6129.53 ; D_reg18.1@3453.58,6170 cw(c3453.58,6070) 3475,6167.68 cw(c3453.58,6070) D_reg18.1@3524.29,6140.71 ; D_reg18.1@3474.13,6180 3474.13,6194.44 ccw(c3374.13,6194.44) 3444.84,6265.16 3342.39,6367.61 ; SRAM.12@3500,4765 3568.58,4765 ccw(c3568.58,4865) 3639.29,4794.29 3640,4795 cw(c3699.21,4735.79) 3699.21,4819.53 C_mem_local4.2@3820,4819.53 3829.05,4819.53 cw(c3829.05,4719.53) v1@3899.76,4790.24 ; C_bypass4.2@3520,6854.8 C_bypass4.2@3520,6855 ; S_rst.1@3760,5789.53 3760,6093.79 cw(c3811.21,6093.79) v1@3775,6130 ; C_bypass.2@3900,6409.53 C_bypass.2@3900,6425 ; C_bypass.2@3900,6410 v1(3900,6495) ; 4099.22,4931.89 cw(c4099.22,4874.22) 4140,4915 ; 4102.36,4813.78 ccw(c4102.36,4913.78) v1@4173.07,4843.07 ; C_FTDI1.2@4140,5879.53 4239.93,5879.53 cw(c4239.93,5829.93) v1(4275,5865) ; 4141.72,4913.28 cw(c4073.43,4845) v1@4170,4845 ; CPLD.84@4281.26,4752.76 4281.26,4788.9 cw(c4311.1,4788.9) 4290,4810 4316.46,4836.46 cw(c4325,4827.93) v1(4325,4840) ; v1@4288.58,5865 cw(c4288.58,5765) 4359.29,5835.71 4415,5780 cw(c4385.54,5750.54) 4427.2,5750.54 FTDI.7@4427.2,5719.09 ; v1(4325,6300) 4409.53,6300 cw(c4409.53,6220) C_FTDI2.1@4489.53,6220 ; FTDI.25@4350,5980 ccw(c4347.81,5977.81) 4347.81,5980.91 FTDI.26@4324.84,5980.91 ; FTDI.25@4350.43,5980.91 4350.43,6055 ; C_FTDI3.1@4350.43,6101.88 4350.43,6055 ; C_leds.1@4400,4029.53 v1(4400,4125) ; C_FTDI2.1@4490,6200 cw(c4490,6160.43) 4529.57,6160.43 FTDI.18@4529.57,5980.91 ; CPLD.31@4497.8,5347.24 4497.8,5313.63 ccw(c4597.8,5313.63) v1@4527.08,5242.92 ; 4529.57,6130.69 FTDI.18@4529.57,5980.91 ; v1@4541.33,5228.67 ccw(c4592.48,5279.81) 4592.48,5207.48 ; v1@4546.93,5256.93 cw(c4617.64,5186.22) 4617.64,5286.22 CPLD.25@4657.24,5286.22 ; v1(4570,4850) cw(c4506.7,4786.7) 4596.22,4786.7 CPLD.100@4596.22,4752.76 ; 4784.8,5286.22 ccw(c4784.8,5386.22) 4855.51,5315.51 C_osc.1@4910,5370 ; OSC.2@4800,5655 4880.71,5574.29 cw(c4810,5503.58) 4910,5503.58 C_osc.1@4910,5370 ; C_osc.1@4901.77,5356.77 4910,5365 C_osc.1@4910,5370 ; P_bnc2.1@4980,3300 P_bnc1.1@6160,3300 6738.79,3300 ccw(c6738.79,3351.21) BNC_1.2@6769.65,3310.35 ; BNC_2.2@5523.43,3520 5523.43,3453 ccw(c5623.43,3453) 5552.71,3382.29 BNC_2.2@5630,3305 ; v1(5660,4680) cw(c5695,4680) 5695,4715 DAC.16@5799.13,4715 5821.72,4715 cw(c5821.72,4646.72) 5870,4695 5925.71,4639.29 ccw(c5996.42,4710) 5996.42,4610 6020.86,4610 ccw(c6020.86,4644.14) 6045,4620 ccw(c6020.86,4644.14) 6055,4644.14 C_dac3.2@6055,4670 ; DAC.20@5799.13,4915 6010.86,4915 ccw(c6010.86,4949.14) 6032.84,4923.02 ccw(c6010.86,4949.14) 6035,4925 ccw(c5998.79,4961.21) 6050,4961.21 R_dac2.1@6050,4970 ; DAC.26@5800,5215 5943.11,5215 cw(c5943.11,5115) C_dac_local1.1@6013.82,5185.71 ; C_dac_local1.1@6000,5200 ccw(c6001.14,5201.14) 6001.14,5199.53 C_dac1.1@6200,5199.53 6269.72,5199.53 ccw(c6269.72,5235.28) 6295,5210 ; C_dac3.2@6049.53,4670 C_dac3.2@6055,4670 ; R_dac2.1@6049.53,4980.93 R_dac3.1@6049.53,5050 ; R_dac2.1@6050,4975 6118.64,4975 cw(c6118.64,4887.22) 6120,4974.99 ; 6120,4785 6120,4974.99 ; 6120,4789.14 cw(c6085.86,4789.14) 6110,4765 cw(c6073.79,4801.21) 6073.79,4750 R_dac1.1@6055,4750 ; 6120,4955 cw(c6132.07,4942.93) 6132.07,4960 K_amp.1@6210.47,4960 ; v1(6145,5025) 6137.68,5017.68 ccw(c6180.36,4975) 6120,4975 ; C_lpf1.1@6149.71,3875 C_lpf2.1@6150,3635 ; 6150,3700 v1(6620,3700) 6620,3601.42 ccw(c6720,3601.42) 6649.29,3530.71 BNC_1.2@6670,3510 ; C_lpf1.1@6150,3875 v1(6255,3875) ; P_bnc1.1@6155,3305 cw(c6177.24,3282.76) P_bnc1.1@6177.24,3314.21 ; v1(6190,4670) C_dac3.2@6055,4670 ; 6295.71,5210.71 ccw(c6225,5281.42) 6325,5281.42 v1(6325,5325) v1(6620,5325) ; 6450,4054.53 6494.93,4054.53 cw(c6494.93,4004.93) 6530,4040 U_amp.4@6530,4038.27 U_amp.4@6530,4020 ; U_amp.4@6530,4019.14 U_amp.4@6530,4020 ; R_amp_fb1.1@6770,3900 ccw(c6757.93,3887.93) 6757.93,3905 6686.42,3905 cw(c6686.42,4005) 6615.71,3934.29 U_amp.4@6530,4020 ; BNC_1.2@6775,3305 BNC_1.2@6769.65,3310.35 ; BNC_1.2@6775,3310 BNC_1.2@6775,3314.21 ; BNC_1.2@6775.79,3314.21 BNC_1.2@6775,3314.21 ; v1(6850,5075) cw(c6850,5015) 6910,5015 6910,3615 cw(c6810,3615) 6810,3515 BNC_1.2@6673.43,3515 6673.43,3448 ccw(c6773.43,3448) 6702.71,3377.29 BNC_1.2@6769.65,3310.35 ; Reg33.3@2430,6505 2430,6491.42 ccw(c2530,6491.42) 2459.29,6420.71 2480,6400 ; 2480,6400 2562.93,6400 cw(c2562.93,6382.93) 2575,6395 ccw(c2587.07,6407.07) 2587.07,6390 v1(2705,6390) ; v1(2705,6390) ccw(c2705,6389.29) 2704.29,6389.29 v1(2705,6390) ; C_mem_local2.1@2825,4700.47 ccw(c2826.14,4701.61) C_mem_local2.1@2826.14,4700 ; C_mem_local2.1@2825,4700.47 ccw(c2826.14,4701.61) C_mem_local2.1@2826.14,4700 ; Reg18.4@3110.93,6505.73 cw(c3113.52,6501.48) 3113.52,6506.46 Reg18.3@3160,6506.46 ; Reg18.3@3160,6506.46 3160,6593.58 cw(c3260,6593.58) C_reg18_in.1@3183.75,6658.28 ; Reg18.3@3160,6506.46 3160,6481.42 ccw(c3260,6481.42) 3189.29,6410.71 3210,6390 ; Reg18.7@3210,6313.54 3210,6390 ; 3342.39,6367.61 ccw(c3288.34,6313.57) 3288.34,6390 cw(c3288.34,6313.57) 3342.39,6367.61 ; FTDI.26@4324.84,5980.91 ccw(c4327.03,5983.09) 4327.03,5980 cw(c4327.03,5983.09) FTDI.26@4324.84,5980.91 ; 4350.43,6055 4427.93,6055 cw(c4427.93,6037.93) 4440,6050 cw(c4409.11,6019.11) 4452.8,6019.11 FTDI.21@4452.8,5980.91 4452.8,5927.39 ccw(c4477.39,5927.39) 4460,5910 ccw(c4472.07,5922.07) 4472.07,5905 4500.86,5905 ccw(c4500.86,5939.14) 4525,5915 ccw(c4513.98,5926.02) 4529.57,5926.02 FTDI.18@4529.57,5980.91 ; R_dac1.1@6049.53,4750 cw(c6048.39,4748.86) 6050,4748.86 ccw(c6048.39,4748.86) R_dac1.1@6049.53,4750 ; R_dac1.1@6049.53,4750 R_dac1.1@6055,4750 ; C_dac3.2@6055,4670 R_dac1.1@6055,4750 ; BNC_1.2@6769.65,3310.35 ccw(c6738.79,3351.21) BNC_1.2@6774.2,3314.21 ; BNC_1.2@6774.2,3314.21 ccw(c6738.79,3351.21) 6775,3315 BNC_1.2@6775,3314.21 ; BNC_1.2@6774.2,3314.21 BNC_1.2@6775,3314.21
  Top Layer w20: C_bypass3.2@2720,6840 P_power.1@3040,6840 ; SRAM.40@3055.59,4545.28 SRAM.39@3055.59,4576.77 ; C_bypass4.2@3520,6855 v1(4010,6855)
  Bottom Layer w12: TP_gnd.1@2300,5400 2575.71,5675.71 cw(c2646.42,5605) 2646.42,5705 J_clkdiv.1@2765,5705 ; v1@2700,6385 cw(c2705,6385) v1(2705,6390) ccw(c2700,6390) v1@2700,6395 ; J_clkdiv.1@2770,5705 2803.58,5705 cw(c2803.58,5605) 2874.29,5675.71 2925.71,5624.29 ccw(c2996.42,5695) 2996.42,5595 3353.58,5595 cw(c3353.58,5495) 3424.29,5565.71 P_JTAG.2@3460,5530 3870.71,5119.29 cw(c3800,5048.58) 3900,5048.58 v1(3900,4790) ; v1(2840,4625) 3283.58,4625 ccw(c3283.58,4725) 3354.29,4654.29 3460.71,4760.71 cw(c3531.42,4690) 3531.42,4790 v1(3900,4790) ; P_power.1@3040,6840 v1@4010,6840 ; v1(3775,6135) 3775,6395 cw(c3875,6395) v1@3875,6495 ; v1(3900,6495) 3900,6525 cw(c3955,6525) 3955,6580 K_USB.2@4010,6580 ; v1(4010,6855) v1@4010,6840 ; 4130,4795 4146.18,4778.82 ccw(c4216.89,4849.53) 4216.89,4749.53 C_cpld_local15.1@4220,4749.53 C_cpld_local16.1@4520,4749.53 ; 4159.29,4819.29 cw(c4088.58,4890) 4088.58,4790 v1(3900,4790) ; v1@4285,5880 4348.39,5880 ; C_USB1.2@4300,6465 4250,6465 ; C_cpld_local7.2@4307.76,4755 4325,4755 v1(4325,4840) ; 4350,5880 4503.58,5880 cw(c4503.58,5780) 4574.29,5850.71 4607.5,5817.5 ; C_cpld_local13.2@4355,5070 v1(4175,5070) 4139.29,5105.71 cw(c4210,5176.42) 4110,5176.42 C_cpld_local1.1@4110,5318.86 ; v1(4400,4125) 4000,4125 cw(c4000,4225) 3900,4225 v1(3900,4790) ; USB_1.4@4404.53,6469.53 C_USB1.2@4300,6469.53 ; C_cpld_local4.1@4460,5449.53 C_cpld_local3.1@4540,5449.53 4743.86,5449.53 ccw(c4743.86,5451.14) 4745,5450 ; v1@4512.93,5232.93 cw(c4530,5215.86) v1(4530,5240) ; C_cpld_local16.1@4525,4750 4540.71,4765.71 ccw(c4470,4836.42) 4570,4836.42 v1(4570,4850) 4570,4975 4980,4975 C_cpld_local5.2@4980,4969.53 ; C_cpld_local12.2@4565,5009.07 cw(c4580.46,5009.07) C_cpld_local12.2@4569.53,5020 cw(c4568.39,5018.86) C_cpld_local12.2@4570,5018.86 ; C_cpld_local9.2@4569.53,4940 4569.53,5018.86 cw(c4571.14,5018.86) 4570,5020 4570,5028.58 ccw(c4470,5028.58) 4540.71,5099.29 4520.21,5119.79 cw(c4568.99,5168.58) 4500,5168.58 cw(c4600,5168.58) 4529.29,5239.29 v1(4530,5240) ; 4610,5820 4715.71,5714.29 cw(c4645,5643.58) 4745,5643.58 4745,5450 ; 4745,5346.42 4745,5370 ; v1(5660,4680) 6180,4680 cw(c6180,4670) v1(6190,4670) ; C_dac_ana_local1.1@5868.86,5055.47 cw(c5868.86,5053.86) C_dac_ana_local1.1@5870,5055 ; v1@6144.29,5025.71 v1(6145,5025) ; v1@6195,4675 cw(c6190,4675) v1(6190,4670) ; v1(6255,3875) 6255,4605 ccw(c6190,4605) v1(6190,4670) ; C_pi5va_a.2@6360,5050.47 6524.05,5050.47 ccw(c6524.05,5150.47) 6594.76,5079.76 6595.71,5080.71 ccw(c6525,5151.42) 6625,5151.42 v1@6625,5325 ; C_pi5va_d.2@6450,5315 ccw(c6425.86,5290.86) 6425.86,5325 v1(6325,5325) 4745,5325 ; v1@6619.53,3716.14 ccw(c6621.14,3716.14) v1@6620,3715 ; C_amp_local_1.1@6619.53,3810.95 C_amp_local_1.1@6619.53,3825 6619.53,3853.5 ; v1(6620,5325) v1@6625,5325 ; v1(6850,5075) 6850,5225 ccw(c6750,5225) 6750,5325 v1@6625,5325 ; K_USB.2@4010,6580 K_USB.2@4010.47,6580 4010.47,6565 ccw(c4110.47,6565) 4110.47,6465 4250,6465 ; K_USB.2@4010,6580 v1@4010,6840 ; C_cpld_local1.1@4110,5318.86 cw(c4111.61,5318.86) C_cpld_local1.1@4110.47,5320 ccw(c4111.61,5318.86) C_cpld_local1.1@4110,5318.86 ; 4250,6375 ccw(c4325,6375) v1(4325,6300) ; 4250,6375 ccw(c4325,6375) v1(4325,6300) ; 4250,6375 ccw(c4325,6375) v1(4325,6300) ; 4250,6375 4250,6465 ; C_USB1.2@4300,6469.53 cw(c4305.47,6469.53) 4305.47,6475 ccw(c4305.47,6469.53) C_USB1.2@4300,6469.53 ; v1(4530,5240) ccw(c4554.14,5264.14) 4554.14,5230 4720,5230 ccw(c4659.64,5290.36) 4745,5290.36 4745,5325 ; 4745,5325 4745,5370 ; 4745,5370 4745,5450
  Bottom Layer w20: C_dac_ana_local2.1@5770,5055.47 C_dac_ana_local1.1@5868.86,5055.47 ; C_dac_ana_local1.1@5870,5055 6073.58,5055 cw(c6073.58,4955) v1@6144.29,5025.71 ; v1(6145,5025) 6279.64,5025 ccw(c6279.64,5110.36) C_pi5va_a.2@6340,5050
  Bottom Layer w40: v1@6619.53,3716.14 C_amp_local_1.1@6619.53,3825 ; 6619.53,3853.5 cw(c6706.5,3853.5) v1(6645,3915)
  other v1: 4178.27,4843.07
DAC_CLK: CPLD.22 DAC.28 | length 1196.9
  Top Layer w10: CPLD.22@4657.24,5227.17 5075.74,5227.17
  Top Layer w12: 5075.74,5227.17 ccw(c5075.74,5327.17) 5146.45,5256.45 5215.71,5325.71 cw(c5286.42,5255) 5286.42,5355 5571.72,5355 cw(c5571.72,5286.72) 5620,5335 ccw(c5668.28,5383.28) 5668.28,5315 DAC.28@5799.13,5315
DAC_DATA0: CPLD.19 DAC.1 | length 840
  Top Layer w10: CPLD.19@4657.24,5168.11 5091.69,5168.11 ccw(c5091.69,5268.11) 5162.4,5197.4
  Top Layer w12: 5162.4,5197.4 5250.71,5285.71 cw(c5321.42,5215) 5321.42,5315 DAC.1@5440.87,5315 DAC.1@5445,5315
DAC_DATA1: CPLD.18 DAC.2 | length 827.4
  Top Layer w10: CPLD.18@4657.24,5148.43 5117,5148.43 ccw(c5117,5248.43) 5187.71,5177.71
  Top Layer w12: 5187.71,5177.71 5245.71,5235.71 cw(c5316.42,5165) 5316.42,5265 DAC.2@5440.87,5265 DAC.2@5445,5265
DAC_DATA2: CPLD.17 DAC.3 | length 819.9
  Top Layer w11: CPLD.17@4657.24,5128.74 5147.32,5128.74
  Top Layer w12: 5147.32,5128.74 ccw(c5147.32,5228.74) 5218.03,5158.03 5245.71,5185.71 cw(c5316.42,5115) 5316.42,5215 DAC.3@5440.87,5215 DAC.3@5450,5215
DAC_DATA3: CPLD.16 DAC.4 | length 802.7
  Top Layer w11: CPLD.16@4657.24,5109.06 5177.63,5109.06
  Top Layer w12: 5177.63,5109.06 ccw(c5177.63,5209.06) 5248.34,5138.34 cw(c5312.7,5073.99) 5312.7,5165 DAC.4@5440.87,5165 DAC.4@5445,5165
DAC_DATA4: CPLD.15 DAC.5 | length 789.6
  Top Layer w11: CPLD.15@4657.24,5089.37 5247.27,5089.37
  Top Layer w12: 5247.27,5089.37 ccw(c5247.27,5142.73) 5285,5105 cw(c5309.14,5080.86) 5309.14,5115 DAC.5@5440,5115
DAC_DATA5: CPLD.14 DAC.6 | length 789
  Top Layer w11: CPLD.14@4657.24,5069.69 DAC.6@5433.69,5069.69
  Top Layer w12: DAC.6@5433.69,5069.69 cw(c5433.69,5053.69) DAC.6@5445,5065